# Altium PCB V2.PcbDoc
Units mil, origin at the board's own origin, x right, y up, seen from the top; angles counter-clockwise.
Board outline 2420 x 2113 mil, 2 copper layers (Top Layer, Bottom Layer); 77 components, 0 nets, 304 pads, 0 vias.
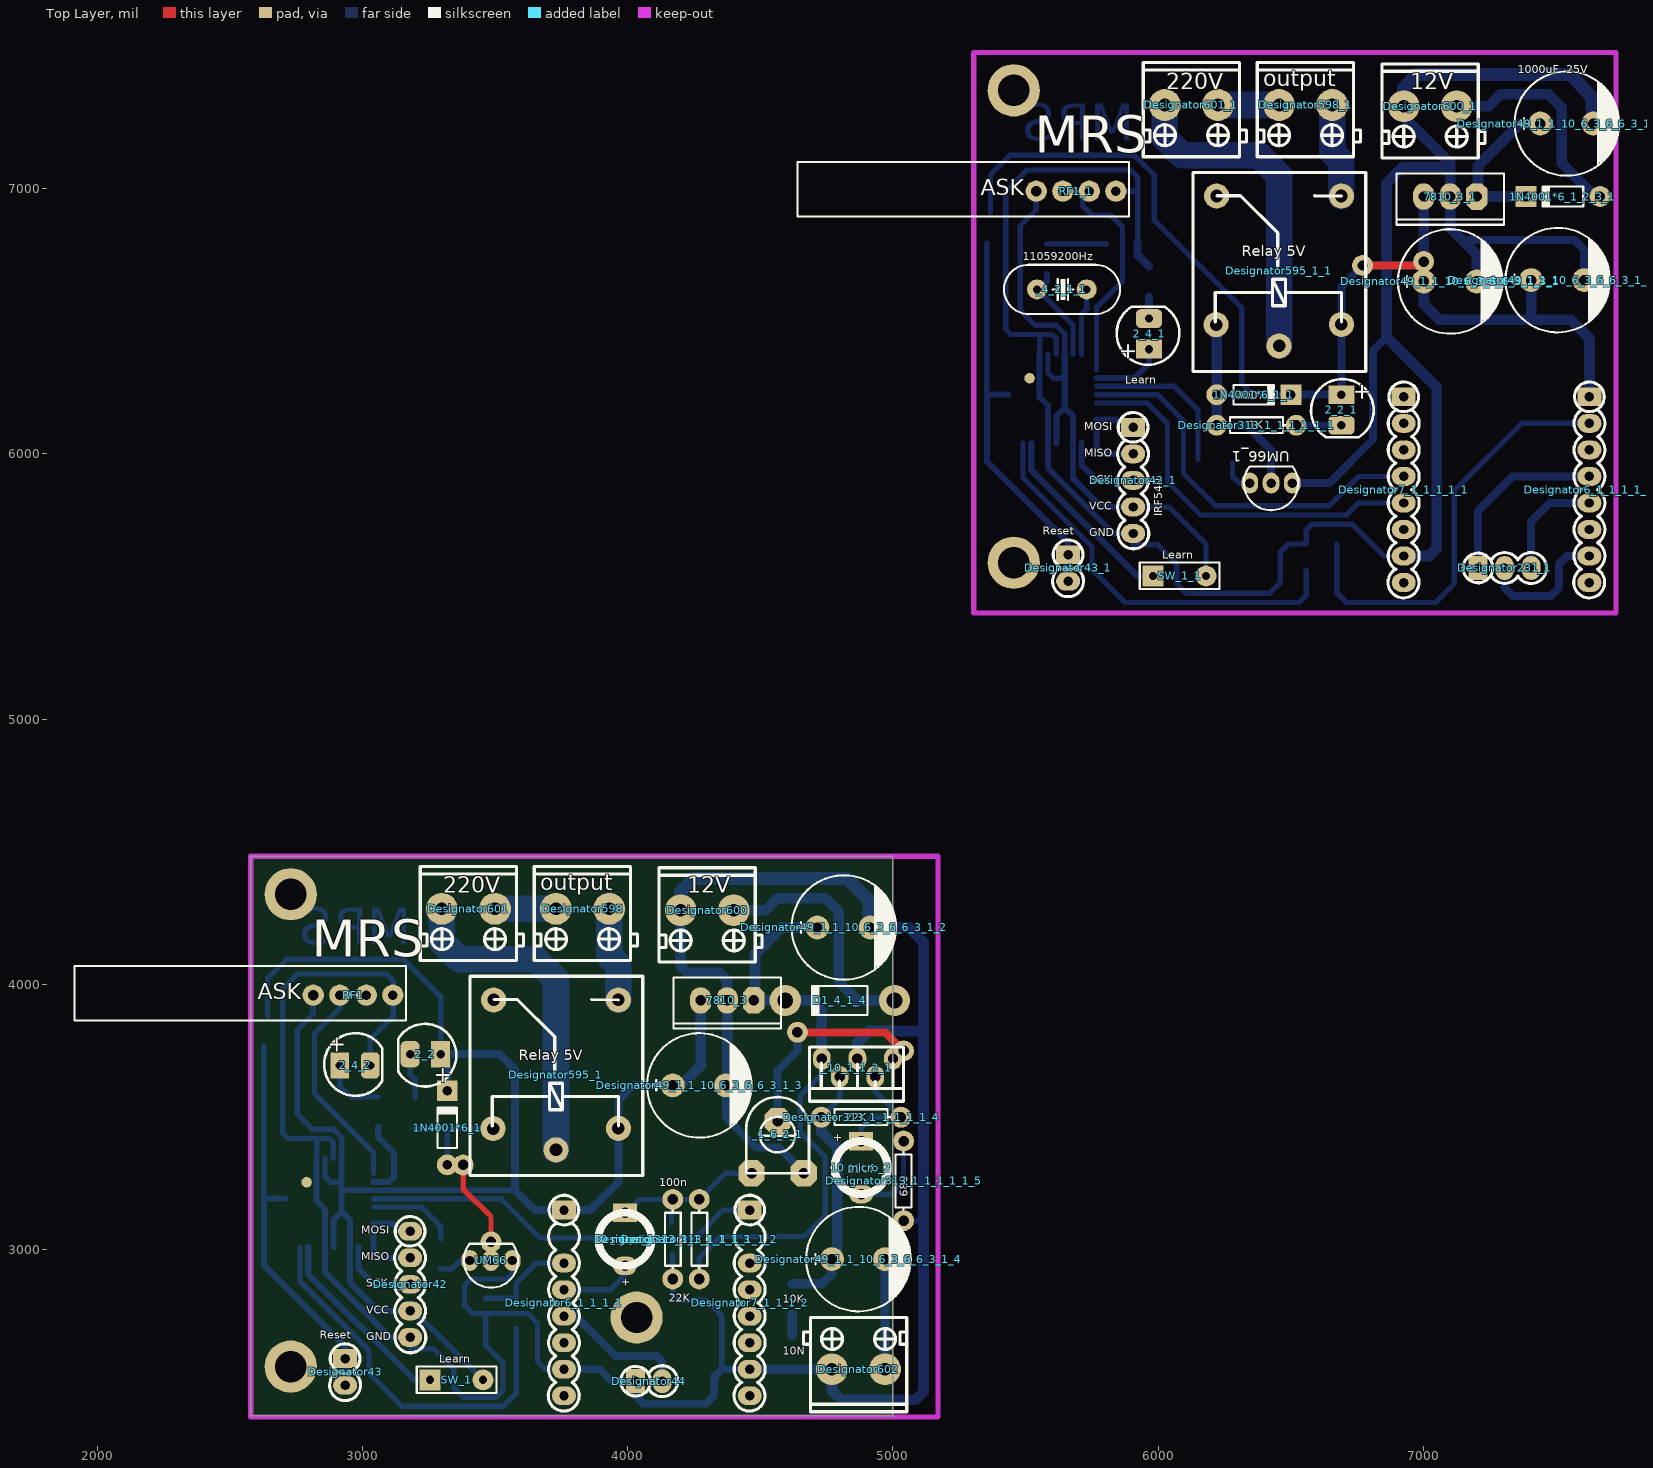
[diagram p0: Top Layer view]
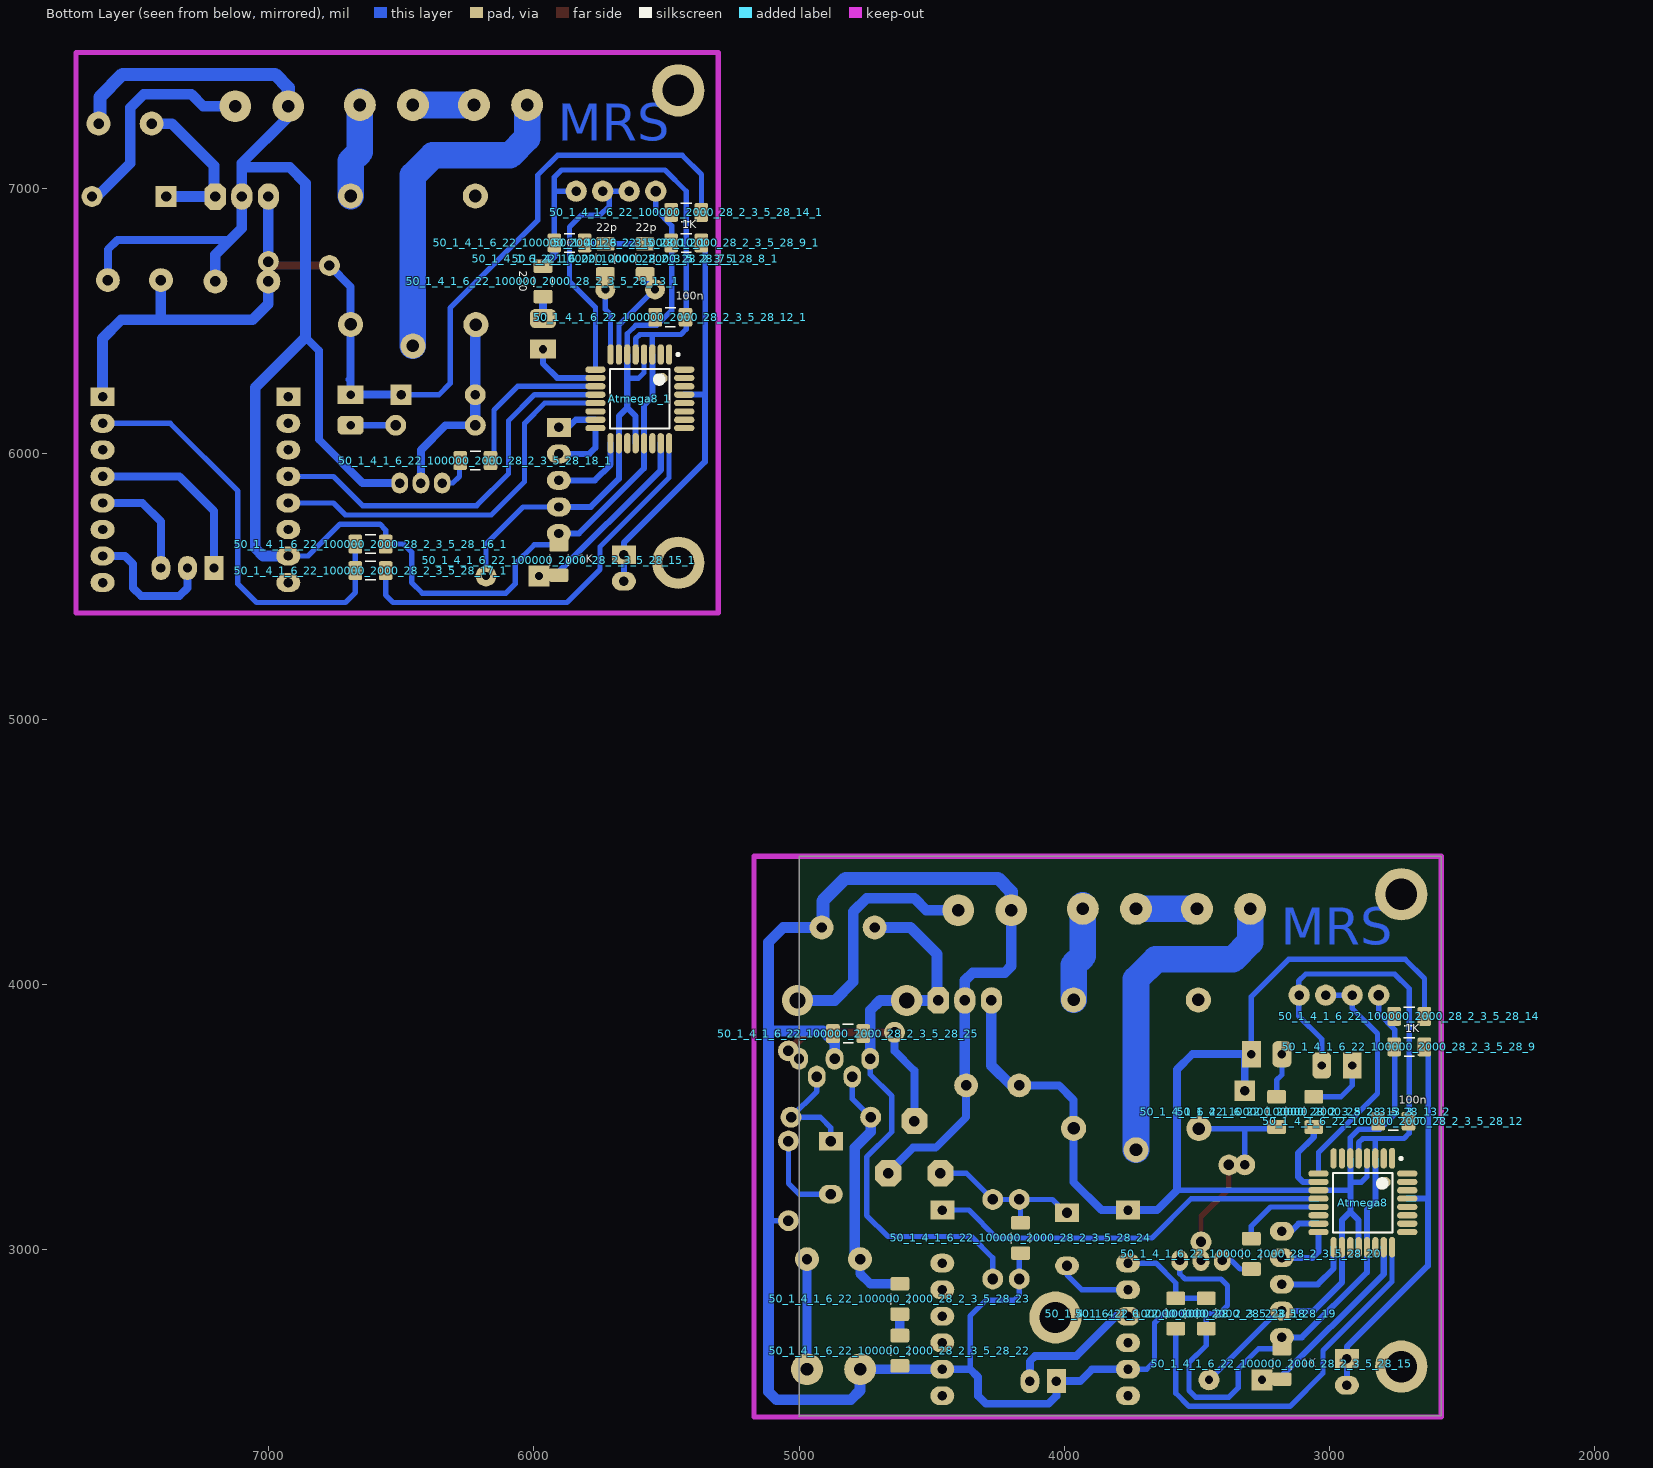
[diagram p1: Bottom Layer view, seen from below]

## Layer stack, top to bottom
Top Layer: signal copper 1.4
Dielectric: dielectric 12.6, FR-4, Dk 4.8
Bottom Layer: signal copper 1.4

## Board outline
2580,4483 5000,4483 5000,2370 4995,2375 2580,2375

## Design rules (kind name [scope] priority, off if disabled: settings)
Clearance [All] p1: gap=10
ComponentClearance [All] p1: gap=10 collisioncheckmode=3 verticalgap=10
PolygonConnect [All] p1: connectstyle=Relief reliefconductorwidth=10 reliefentries=4 polygonreliefangle="90 Angle"
RoutingVias [All] p1: holewidth=28 width=50 viastyle="Through Hole" minholewidth=28 minwidth=50 maxholewidth=28 maxwidth=50
SolderMaskExpansion [All] p1: expansion=4
TestPointUsage [All] p1: valid=0 allowmultiple=FALSE
Testpoint [All] p1: side=15 testpointundercomponent=TRUE minsize=40 maxsize=100 preferedsize=60 minholesize=0 maxholesize=40 preferedholesize=32 testpointgrid=1 style=1023 order=0-112345678
Width [All] p1: maxlimit=10 minlimit=10 preferedwidth=10
18 further rules are at their usual default settings.

## Components (designator, comment, footprint, x,y, rotation, side; value= is the part's Value field where it differs from the comment)
1N4001*6_1 "Comment" DIO7.1-3.9x1.9#1 3320,3460 r90 top
1N4001*6_1_1 "Comment" DIO7.1-3.9x1.9#1 6360,6223 r0 top
1N4001*6_1_2_3_1 "Comment" DIO7.1-3.9x1.9#2 7525,6970 r180 top
2_2 "Comment" LED-1 3240,3737.38 r270 top
2_2_1 "Comment" LED-1 6690,6168 r0 top
2_4_1 "Comment" LED-1 5965,6450 r180 top
2_4_2 "Comment" LED-1 2970,3695 r90 top
"10 micro_1" "" EC2/2 3990,3140 r180 top
"10 micro_2" "" EC2/2 4880,3410 r180 top
50_1_4_1_6_22_100000_2000_28_2_3_5_28_7_1 "Comment" RESC3216X70N 5730,6735 r270 bottom
50_1_4_1_6_22_100000_2000_28_2_3_5_28_8_1 "Comment" RESC3216X70N 5580,6735 r270 bottom
50_1_4_1_6_22_100000_2000_28_2_3_5_28_9 "Comment" RESC3216X70N 2700,3765 r0 bottom
50_1_4_1_6_22_100000_2000_28_2_3_5_28_9_1 "Comment" RESC3216X70N 5425,6795 r0 bottom
50_1_4_1_6_22_100000_2000_28_2_3_5_28_10_1 "Comment" RESC3216X70N 5865,6795 r0 bottom
50_1_4_1_6_22_100000_2000_28_2_3_5_28_12 "Comment" RESC3216X70N 2760,3485 r0 bottom
50_1_4_1_6_22_100000_2000_28_2_3_5_28_12_1 "Comment" RESC3216X70N 5485,6515 r0 bottom
50_1_4_1_6_22_100000_2000_28_2_3_5_28_13_1 "Comment" RESC3216X70N 5965,6650 r270 bottom
50_1_4_1_6_22_100000_2000_28_2_3_5_28_13_2 "Comment" RESC3216X70N 3060,3520 r90 bottom
50_1_4_1_6_22_100000_2000_28_2_3_5_28_13_3 "Comment" RESC3216X70N 3200,3520 r90 bottom
50_1_4_1_6_22_100000_2000_28_2_3_5_28_14 "Comment" RESC3216X70N 2700,3880 r0 bottom
50_1_4_1_6_22_100000_2000_28_2_3_5_28_14_1 "Comment" RESC3216X70N 5425,6910 r0 bottom
50_1_4_1_6_22_100000_2000_28_2_3_5_28_15 "Comment" RESC3216X70N 3180,2570 r90 bottom
50_1_4_1_6_22_100000_2000_28_2_3_5_28_15_1 "Comment" RESC3216X70N 5905,5600 r90 bottom
50_1_4_1_6_22_100000_2000_28_2_3_5_28_16_1 "Comment" RESC3216X70N 6615,5660 r180 bottom
50_1_4_1_6_22_100000_2000_28_2_3_5_28_17_1 "Comment" RESC3216X70N 6615,5560 r180 bottom
50_1_4_1_6_22_100000_2000_28_2_3_5_28_18 "Comment" RESC3216X70N 3580,2760 r90 bottom
50_1_4_1_6_22_100000_2000_28_2_3_5_28_18_1 "Comment" RESC3216X70N 6220,5975 r0 bottom
50_1_4_1_6_22_100000_2000_28_2_3_5_28_19 "Comment" RESC3216X70N 3465,2760 r90 bottom
50_1_4_1_6_22_100000_2000_28_2_3_5_28_20 "Comment" RESC3216X70N 3295,2985 r90 bottom
50_1_4_1_6_22_100000_2000_28_2_3_5_28_22 "Comment" RESC3216X70N 4620,2620 r270 bottom
50_1_4_1_6_22_100000_2000_28_2_3_5_28_23 "Comment" RESC3216X70N 4620,2815 r270 bottom
50_1_4_1_6_22_100000_2000_28_2_3_5_28_24 "Comment" RESC3216X70N 4165,3045 r270 bottom
50_1_4_1_6_22_100000_2000_28_2_3_5_28_25 "Comment" RESC3216X70N 4815,3815 r0 bottom
7810_3 "Comment" 221A-04 4375,3940 r180 top
7810_3_1 "Comment" 221A-04 7100,6970 r180 top
_1_6_2_1 "P-1" VR-P1 4585,3580 r270 top
_4_2_1_1 "Comment" XTAL 5730,6620 r180 top
_10_1_1_2_1 "Comment" "CASE 314B–05" 5000,3720 r180 top
Atmega8 "Comment" My_32A_M 2875,3177.38 r270 bottom
Atmega8_1 "Comment" My_32A_M 5600,6207.38 r270 bottom
D1_4_1_4 "1N4001" DIO10.46-5.3 4800,3940 r180 top
Designator6_1_1_1_1 "Comment" SIP8#1 3760,3150 r270 top
Designator6_1_1_1_1_1 "Comment" SIP8#2 7625,6215 r270 top
Designator7_1_1_1_1_1 "Comment" SIP8#3 6925,6215 r270 top
Designator7_1_1_1_2 "Comment" SIP8#4 4460,3150 r270 top
Designator42 "Comment" SIP5#1 3180,3070 r270 top
Designator42_1 "Comment" SIP5#2 5905,6100 r270 top
Designator43 "Comment" SIP2 2935,2590 r270 top
Designator43_1 "Comment" SIP2 5660,5620 r270 top
Designator44 "Comment" SIP2 4030,2505 r0 top
Designator49_1_1_10_6_3_6_6_3_1_2 "Comment" "cap 04" 4815,4215 r180 top
Designator49_1_1_10_6_3_6_6_3_1_2_1 "Comment" "cap 04" 7540,7245 r180 top
Designator49_1_1_10_6_3_6_6_3_1_3 "Comment" "cap 04" 4270,3620 r180 top
Designator49_1_1_10_6_3_6_6_3_1_3_1 "Comment" "cap 04" 7100,6650 r180 top
Designator49_1_1_10_6_3_6_6_3_1_4 "Comment" "cap 04" 4870,2965 r180 top
Designator49_1_1_10_6_3_6_6_3_1_5_1 "Comment" "cap 04" 7505,6655 r180 top
Designator231_1 "Comment" SIP3 7205,5570 r0 top
Designator313_1_1_1_1_1_1 "Comment" AXIAL-0.3 6370,6108 r0 top
Designator313_1_1_1_1_1_2 "Comment" AXIAL-0.3 4270,3040 r90 top
Designator313_1_1_1_1_1_3 "Comment" AXIAL-0.3 4170,3040 r90 top
Designator313_1_1_1_1_1_4 "Comment" AXIAL-0.3 4880,3500 r180 top
Designator313_1_1_1_1_1_5 "Comment" AXIAL-0.3 5040,3260 r270 top
Designator595_1 "Comment" RELAY3 3965,3458 r180 top
Designator595_1_1 "Comment" RELAY3 6690,6488 r180 top
Designator598 "Comment" TER2 3930,4285 r0 top
Designator598_1 "Comment" TER2 6655,7315 r0 top
Designator600 "Comment" TER2 4400,4280 r0 top
Designator600_1 "Comment" TER2 7125,7310 r0 top
Designator601 "Comment" TER2 3500,4285 r0 top
Designator601_1 "Comment" TER2 6225,7315 r0 top
Designator602 "Comment" TER2 4770,2550 r180 top
RF1 "Comment" HDR1X4 2815,3960 r0 top
RF1_1 "Comment" HDR1X4 5540,6990 r0 top
SW_1 "Comment" HDR1X3 3255,2510 r0 top
SW_1_1 "Comment" HDR1X3 5980,5540 r0 top
UM66 "Comment" 78LXX#1 3485,2960 r0 top
UM66_1 "Comment" 78LXX#2 6425,5890 r0 top

## Footprints (in the part's own frame and the unit in brackets; to place one, negate y for a bottom-side part, rotate by r counter-clockwise, add the part's x,y. Pads: shape width x height; smd on the part's side, far side on the other; paste and mask are expansions set on the pad)
78LXX#1 [mm]
  oval 1.6x2 hole 0.9: B(-2.032,0) C(0,0)
  oval 1.6x2 hole 0.9 mask+0.102: E(2.032,0)
  silkscreen extent -2.6,-2.6 2.6,1.6, body extent -2.48,-2.3 2.32,1.63, height 8
78LXX#2 [mm]
  oval 1.6x2 hole 0.9: GND(2.032,0) Out(-2.032,0) VCC(0,0)
  silkscreen extent -2.6,-2.6 2.6,1.6, body extent -2.48,-2.3 2.32,1.63, height 8
221A-04 [mil]
  oval 80x100 hole 39.37: D(0,0) S(100,0)
  oct 80x100 hole 39.37: G(-100,0)
  silkscreen extent -203,-87 203,106
AXIAL-0.3 [mm]
  round 2 hole 1.016: 1(-3.81,0) 2(3.81,0)
  silkscreen extent -2.77,-0.76 2.77,0.76
"cap 04" [mil]
  round 90 hole 39.37: 1(100,0) 2(-100,0)
  silkscreen extent -197,-197 197,197, body extent -198,-197 198,199, height 513
"CASE 314B–05" [mm]
  oval 1.7x2.1 hole 1: 1(0,0) 2(1.702,1.702) 3(3.404,0) 4(5.105,1.702) 5(6.807,0)
  silkscreen extent -0.99,-1.14 7.98,4.06
DIO7.1-3.9x1.9#1 [mm]
  round 2 hole 0.9: 1(-3.55,0)
  rect 2x2 hole 0.9: 2(3.55,0)
  silkscreen extent -1.95,-0.95 2.05,0.95
DIO7.1-3.9x1.9#2 [mm]
  round 2 hole 1: 1(-3.55,0)
  rect 2x2 hole 1: 2(3.55,0)
  silkscreen extent -1.95,-0.95 2.05,0.95
DIO10.46-5.3 [mm]
  round 3 hole 1.5: 1(-5.23,0) 2(5.23,0)
  silkscreen extent -2.65,-1.4 2.75,1.4
EC2/2 [mil]
  rect 90x70 hole 39.37: 1(0,0)
  oval 90x70 hole 39.37: 2(0,200)
  silkscreen extent -100,0 100,200
HDR1X3 [mm]
  round 0 all layers, no hole: 2(2.54,0)
  round 2 hole 0.8: +(5.08,0)
  rect 2x2 hole 0.8: -(0,0)
  silkscreen extent -1.27,-1.27 6.35,1.27
HDR1X4 [mil] "Connector; Header; 4 Position"
  round 80 hole 35.43: 2(100,0) -(300,0) ""(200,0)
  round 80 hole 40: +(0,0)
  silkscreen extent -900,-95 350,110
LED-1 [mm] "LED; 2 Leads"
  rect 2.5x1.8 hole 0.8: 1(0,1.397)
  rrect50% 2.5x1.8 hole 0.8: 2(0,-1.524)
  silkscreen extent -2.91,-2.67 3.09,2.9
My_32A_M [mm]
  oct 1.95x0.6 smd: 1(-4.25,2.8)
  oval 0.6x1.95 smd: 10(-2,-4.25) 13(0.4,-4.25) 14(1.2,-4.25) 25(2.8,4.25) 26(2,4.25) 27(1.2,4.25) 32(-2.8,4.25) B0(-0.4,-4.25) C5(0.4,4.25) D5(-2.8,-4.25) D7(-1.2,-4.25) MISO(2.8,-4.25) MOSI(2,-4.25) RESET(-0.4,4.25) RX(-1.2,4.25) TX(-2,4.25)
  oval 1.95x0.6 smd: 19(4.25,-1.2) 22(4.25,1.2) 24(4.25,2.8) AREF(4.25,-0.4) AVCC(4.25,-2) B5/SCK(4.25,-2.8) C0(4.25,2) D4(-4.25,2) GND(-4.25,-0.4) GND(-4.25,1.2) GND(4.25,0.4) VCC(-4.25,-1.2) VCC(-4.25,0.4) XTAL(-4.25,-2.8) XTAL(-4.25,-2)
  silkscreen extent -4.37,-2.85 2.85,3.77, body extent -3.5,-3.5 3.5,3.5, height 1.2
RELAY3 [mm]
  round 2.4 hole 1.2: 1(0,0) 2(11.989,0.025) 3(5.969,2.057) 4(11.938,-12.294) 5(0,-12.294)
  silkscreen extent -2.34,-14.55 14.2,4.52
RESC3216X70N [mm] "Chip Resistor, Body 3.2x1.6mm, EIA 1206, IPC Medium Density"
  round 0.508 on Mech15: 0(0,0)
  rrect25% 1.3x1.8 smd: 1(-1.45,0) 2(1.45,0)
  silkscreen extent -0.51,-0.89 0.51,0.89, body extent -1.62,-0.82 1.63,0.83, height 0.69
SIP2 [mm]
  rect 1.8x2.3 hole 0.9: 1(0,0)
  oval 1.8x2.3 hole 0.9: 2(2.54,0)
  silkscreen extent -1.42,-1.48 4.02,1.48
SIP3 [mm]
  rect 1.8x2.3 hole 0.9: 1(0,0)
  oval 1.8x2.3 hole 0.9: 2(2.54,0) 3(5.08,0)
  silkscreen extent -1.42,-1.48 6.56,1.48
SIP5#1 [mm]
  oval 1.8x2.3 hole 0.9: 1(0,0) 2(2.54,0) 3(5.08,0) 4(7.62,0) 5(10.16,0)
  silkscreen extent -1.42,-1.48 11.62,1.5
SIP5#2 [mm]
  rect 1.8x2.3 hole 0.9: 1(0,0)
  oval 1.8x2.3 hole 0.9: 2(2.54,0) 3(5.08,0) 4(7.62,0) 5(10.16,0)
  silkscreen extent -1.42,-1.48 11.62,1.5
SIP8#1 [mm]
  oval 1.8x2.3 hole 0.9: DAC_L(10.16,0) DAC_R(7.62,0) GNF(15.24,0) SPK+(12.7,0) SPK-(17.78,0) TX(5.08,0)
  round 0 all layers, no hole: RX(2.54,0)
  rect 1.8x2.3 hole 0.9: vcc(0,0)
  silkscreen extent -1.42,-1.5 19.24,1.48
SIP8#2 [mm]
  oval 1.8x2.3 hole 0.9: DAC_L(10.16,0) DAC_R(7.62,0) GNF(15.24,0) RX(2.54,0) SPK+(12.7,0) SPK-(17.78,0) TX(5.08,0)
  rect 1.8x2.3 hole 0.9: vcc(0,0)
  silkscreen extent -1.42,-1.5 19.24,1.48
SIP8#3 [mm]
  oval 1.8x2.3 hole 0.9: ADDKEY(7.62,0) ADDKEY(10.16,0) GND(15.24,0) IO1(17.78,0) IO2(12.7,0) USB+(5.08,0) USB-(2.54,0)
  rect 1.8x2.3 hole 0.9: BUSY(0,0)
  silkscreen extent -1.42,-1.5 19.24,1.48
SIP8#4 [mm]
  oval 1.8x2.3 hole 0.9: ADDKEY(7.62,0) ADDKEY(10.16,0) GND(15.24,0) IO1(17.78,0) IO2(12.7,0) USB+(5.08,0)
  rect 1.8x2.3 hole 0.9: BUSY(0,0)
  round 0 all layers, no hole: USB-(2.54,0)
  silkscreen extent -1.42,-1.5 19.24,1.48
TER2 [mil]
  round 120 hole 47.24: 1(0,0) 2(-200,0)
  silkscreen extent -282,-195 107,160
VR-P1 [mm]
  oct 2.5x2.5 hole 1: 263(7.4,2) 264(7.4,-3) 266(2.4,-0.5)
  oct 0x0 all layers, no hole: 265(4.9,-0.5) 267(-0.1,-0.5)
  silkscreen extent 0.1,-3.5 7.4,2.5
XTAL [mil]
  round 75 hole 30: 1(0,0) 2(187.4,0)
  silkscreen extent -126,-93 311,93, body extent -131,-94 316,95, height 514

## Part data
7810_3 7810_3_1: library part MC7805BT
RF1 RF1_1: library part COAX-M
SW_1 SW_1_1: library part "Header 3"

## Free pads (board coordinates)
  round 196.85 hole 118.11: 0(2730,2560) 0(2730,4340) 0(4033.74,2745) 0(5455,5590) 0(5455,7370)
  round 40 all layers, no hole: 0(2790,3255) 0(5515,6285)
  round 78.74 hole 39.37: 0(3380,3320) 0(7000,6725) 1(3485,3030) 1(6770,6710) 2(5040,3750) 3(4640,3820)

## Nets (pads, with @x,y where several pads share a name; then routed paths per layer and width w, separated by ;. In a path a pad name is that pad's centre, name@x,y a point inside that pad or via, vN(x,y) a via of type N, cw(c..) or ccw(c..) an arc to the next point about the centre after c; other vN are vias at no path point)
pads on no net: 1N4001*6_1.1 1N4001*6_1.2 1N4001*6_1_1.1 1N4001*6_1_1.2 1N4001*6_1_2_3_1.1 1N4001*6_1_2_3_1.2 2_2.1 2_2.2 2_2_1.1 2_2_1.2 2_4_1.1 2_4_1.2 2_4_2.1 2_4_2.2 50_1_4_1_6_22_100000_2000_28_2_3_5_28_7_1.0 50_1_4_1_6_22_100000_2000_28_2_3_5_28_7_1.1 50_1_4_1_6_22_100000_2000_28_2_3_5_28_7_1.2 50_1_4_1_6_22_100000_2000_28_2_3_5_28_8_1.0 50_1_4_1_6_22_100000_2000_28_2_3_5_28_8_1.1 50_1_4_1_6_22_100000_2000_28_2_3_5_28_8_1.2 50_1_4_1_6_22_100000_2000_28_2_3_5_28_9.0 50_1_4_1_6_22_100000_2000_28_2_3_5_28_9.1 50_1_4_1_6_22_100000_2000_28_2_3_5_28_9.2 50_1_4_1_6_22_100000_2000_28_2_3_5_28_9_1.0 50_1_4_1_6_22_100000_2000_28_2_3_5_28_9_1.1 50_1_4_1_6_22_100000_2000_28_2_3_5_28_9_1.2 50_1_4_1_6_22_100000_2000_28_2_3_5_28_10_1.0 50_1_4_1_6_22_100000_2000_28_2_3_5_28_10_1.1 50_1_4_1_6_22_100000_2000_28_2_3_5_28_10_1.2 50_1_4_1_6_22_100000_2000_28_2_3_5_28_12.0 50_1_4_1_6_22_100000_2000_28_2_3_5_28_12.1 50_1_4_1_6_22_100000_2000_28_2_3_5_28_12.2 50_1_4_1_6_22_100000_2000_28_2_3_5_28_12_1.0 50_1_4_1_6_22_100000_2000_28_2_3_5_28_12_1.1 50_1_4_1_6_22_100000_2000_28_2_3_5_28_12_1.2 50_1_4_1_6_22_100000_2000_28_2_3_5_28_13_1.0 50_1_4_1_6_22_100000_2000_28_2_3_5_28_13_1.1 50_1_4_1_6_22_100000_2000_28_2_3_5_28_13_1.2 50_1_4_1_6_22_100000_2000_28_2_3_5_28_13_2.0 50_1_4_1_6_22_100000_2000_28_2_3_5_28_13_2.1 50_1_4_1_6_22_100000_2000_28_2_3_5_28_13_2.2 50_1_4_1_6_22_100000_2000_28_2_3_5_28_13_3.0 50_1_4_1_6_22_100000_2000_28_2_3_5_28_13_3.1 50_1_4_1_6_22_100000_2000_28_2_3_5_28_13_3.2 50_1_4_1_6_22_100000_2000_28_2_3_5_28_14.0 50_1_4_1_6_22_100000_2000_28_2_3_5_28_14.1 50_1_4_1_6_22_100000_2000_28_2_3_5_28_14.2 50_1_4_1_6_22_100000_2000_28_2_3_5_28_14_1.0 50_1_4_1_6_22_100000_2000_28_2_3_5_28_14_1.1 50_1_4_1_6_22_100000_2000_28_2_3_5_28_14_1.2 50_1_4_1_6_22_100000_2000_28_2_3_5_28_15.0 50_1_4_1_6_22_100000_2000_28_2_3_5_28_15.1 50_1_4_1_6_22_100000_2000_28_2_3_5_28_15.2 50_1_4_1_6_22_100000_2000_28_2_3_5_28_15_1.0 50_1_4_1_6_22_100000_2000_28_2_3_5_28_15_1.1 50_1_4_1_6_22_100000_2000_28_2_3_5_28_15_1.2 50_1_4_1_6_22_100000_2000_28_2_3_5_28_16_1.0 50_1_4_1_6_22_100000_2000_28_2_3_5_28_16_1.1 50_1_4_1_6_22_100000_2000_28_2_3_5_28_16_1.2 50_1_4_1_6_22_100000_2000_28_2_3_5_28_17_1.0 50_1_4_1_6_22_100000_2000_28_2_3_5_28_17_1.1 50_1_4_1_6_22_100000_2000_28_2_3_5_28_17_1.2 50_1_4_1_6_22_100000_2000_28_2_3_5_28_18.0 50_1_4_1_6_22_100000_2000_28_2_3_5_28_18.1 50_1_4_1_6_22_100000_2000_28_2_3_5_28_18.2 50_1_4_1_6_22_100000_2000_28_2_3_5_28_18_1.0 50_1_4_1_6_22_100000_2000_28_2_3_5_28_18_1.1 50_1_4_1_6_22_100000_2000_28_2_3_5_28_18_1.2 50_1_4_1_6_22_100000_2000_28_2_3_5_28_19.0 50_1_4_1_6_22_100000_2000_28_2_3_5_28_19.1 50_1_4_1_6_22_100000_2000_28_2_3_5_28_19.2 50_1_4_1_6_22_100000_2000_28_2_3_5_28_20.0 50_1_4_1_6_22_100000_2000_28_2_3_5_28_20.1 50_1_4_1_6_22_100000_2000_28_2_3_5_28_20.2 50_1_4_1_6_22_100000_2000_28_2_3_5_28_22.0 50_1_4_1_6_22_100000_2000_28_2_3_5_28_22.1 50_1_4_1_6_22_100000_2000_28_2_3_5_28_22.2 50_1_4_1_6_22_100000_2000_28_2_3_5_28_23.0 50_1_4_1_6_22_100000_2000_28_2_3_5_28_23.1 50_1_4_1_6_22_100000_2000_28_2_3_5_28_23.2 50_1_4_1_6_22_100000_2000_28_2_3_5_28_24.0 50_1_4_1_6_22_100000_2000_28_2_3_5_28_24.1 50_1_4_1_6_22_100000_2000_28_2_3_5_28_24.2 50_1_4_1_6_22_100000_2000_28_2_3_5_28_25.0 50_1_4_1_6_22_100000_2000_28_2_3_5_28_25.1 50_1_4_1_6_22_100000_2000_28_2_3_5_28_25.2 7810_3.D 7810_3.G 7810_3.S 7810_3_1.D 7810_3_1.G 7810_3_1.S "10 micro_1.1" "10 micro_1.2" "10 micro_2.1" "10 micro_2.2" _1_6_2_1.263 _1_6_2_1.264 _1_6_2_1.265 _1_6_2_1.266 _1_6_2_1.267 _4_2_1_1.1 _4_2_1_1.2 _10_1_1_2_1.1 _10_1_1_2_1.2 _10_1_1_2_1.3 _10_1_1_2_1.4 _10_1_1_2_1.5 Atmega8.1 Atmega8.10 Atmega8.13 Atmega8.14 Atmega8.19 Atmega8.22 Atmega8.24 Atmega8.25 Atmega8.26 Atmega8.27 Atmega8.32 Atmega8.AREF Atmega8.AVCC Atmega8.B0 Atmega8.B5/SCK Atmega8.C0 Atmega8.C5 Atmega8.D4 Atmega8.D5 Atmega8.D7 Atmega8.GND Atmega8.MISO Atmega8.MOSI Atmega8.RESET Atmega8.RX Atmega8.TX Atmega8.VCC Atmega8.XTAL Atmega8_1.1 Atmega8_1.10 Atmega8_1.13 Atmega8_1.14 Atmega8_1.19 Atmega8_1.22 Atmega8_1.24 Atmega8_1.25 Atmega8_1.26 Atmega8_1.27 Atmega8_1.32 Atmega8_1.AREF Atmega8_1.AVCC Atmega8_1.B0 Atmega8_1.B5/SCK Atmega8_1.C0 Atmega8_1.C5 Atmega8_1.D4 Atmega8_1.D5 Atmega8_1.D7 Atmega8_1.GND Atmega8_1.MISO Atmega8_1.MOSI Atmega8_1.RESET Atmega8_1.RX Atmega8_1.TX Atmega8_1.VCC Atmega8_1.XTAL D1_4_1_4.1 D1_4_1_4.2 Designator6_1_1_1_1.DAC_L Designator6_1_1_1_1.DAC_R Designator6_1_1_1_1.GNF Designator6_1_1_1_1.RX Designator6_1_1_1_1.SPK+ Designator6_1_1_1_1.SPK- Designator6_1_1_1_1.TX Designator6_1_1_1_1.vcc Designator6_1_1_1_1_1.DAC_L Designator6_1_1_1_1_1.DAC_R Designator6_1_1_1_1_1.GNF Designator6_1_1_1_1_1.RX Designator6_1_1_1_1_1.SPK+ Designator6_1_1_1_1_1.SPK- Designator6_1_1_1_1_1.TX Designator6_1_1_1_1_1.vcc Designator7_1_1_1_1_1.ADDKEY Designator7_1_1_1_1_1.BUSY Designator7_1_1_1_1_1.GND Designator7_1_1_1_1_1.IO1 Designator7_1_1_1_1_1.IO2 Designator7_1_1_1_1_1.USB+ Designator7_1_1_1_1_1.USB- Designator7_1_1_1_2.ADDKEY Designator7_1_1_1_2.BUSY Designator7_1_1_1_2.GND Designator7_1_1_1_2.IO1 Designator7_1_1_1_2.IO2 Designator7_1_1_1_2.USB+ Designator7_1_1_1_2.USB- Designator42.1 Designator42.2 Designator42.3 Designator42.4 Designator42.5 Designator42_1.1 Designator42_1.2 Designator42_1.3 Designator42_1.4 Designator42_1.5 Designator43.1 Designator43.2 Designator43_1.1 Designator43_1.2 Designator44.1 Designator44.2 Designator49_1_1_10_6_3_6_6_3_1_2.1 Designator49_1_1_10_6_3_6_6_3_1_2.2 Designator49_1_1_10_6_3_6_6_3_1_2_1.1 Designator49_1_1_10_6_3_6_6_3_1_2_1.2 Designator49_1_1_10_6_3_6_6_3_1_3.1 Designator49_1_1_10_6_3_6_6_3_1_3.2 Designator49_1_1_10_6_3_6_6_3_1_3_1.1 Designator49_1_1_10_6_3_6_6_3_1_3_1.2 Designator49_1_1_10_6_3_6_6_3_1_4.1 Designator49_1_1_10_6_3_6_6_3_1_4.2 Designator49_1_1_10_6_3_6_6_3_1_5_1.1 Designator49_1_1_10_6_3_6_6_3_1_5_1.2 Designator231_1.1 Designator231_1.2 Designator231_1.3 Designator313_1_1_1_1_1_1.1 Designator313_1_1_1_1_1_1.2 Designator313_1_1_1_1_1_2.1 Designator313_1_1_1_1_1_2.2 Designator313_1_1_1_1_1_3.1 Designator313_1_1_1_1_1_3.2 Designator313_1_1_1_1_1_4.1 Designator313_1_1_1_1_1_4.2 Designator313_1_1_1_1_1_5.1 Designator313_1_1_1_1_1_5.2 Designator595_1.1 Designator595_1.2 Designator595_1.3 Designator595_1.4 Designator595_1.5 Designator595_1_1.1 Designator595_1_1.2 Designator595_1_1.3 Designator595_1_1.4 Designator595_1_1.5 Designator598.1 Designator598.2 Designator598_1.1 Designator598_1.2 Designator600.1 Designator600.2 Designator600_1.1 Designator600_1.2 Designator601.1 Designator601.2 Designator601_1.1 Designator601_1.2 Designator602.1 Designator602.2 RF1. RF1.2 RF1.+ RF1.- RF1_1. RF1_1.2 RF1_1.+ RF1_1.- SW_1.2 SW_1.+ SW_1.- SW_1_1.2 SW_1_1.+ SW_1_1.- UM66.B UM66.C UM66.E UM66_1.GND UM66_1.Out UM66_1.VCC
copper on no net: | length 69447.1
  Top Layer w20: 3380,3320 3380,3230 3485,3125 3485,3030
  Top Layer w30: 4640,3820 4970,3820 5040,3750 ; 6770,6710 6985,6710
  Bottom Layer w20: 2627.91,3175 2627.91,3765 ; 2642.91,3880 2642.91,4022.91 2715,4095 3155,4095 3295,3955 3295,3737.38 ; 2764.76,3010.05 2764.76,2880.24 3025,2620 3025,2535 3150,2410 3530,2410 3580,2460 3580,2702.91 ; 2815,3960 2815,3890 2755,3830 2755,3510 2810,3455 2890,3455 2922.24,3422.76 2922.24,3344.7 ; 2827.76,3344.7 2827.76,3420 ; 2859.25,3344.7 2859.25,3275.75 2880,3255 2922.24,3255 ; 2890.75,3344.7 2890.75,3404.25 2875,3420 2828.05,3420 2720,3420 2700,3440 2700,3985 2755,4040 3090,4040 3117.09,4012.91 3117.09,3882.09 3030,3795 3030,3695 ; 2915,3695 2915,3620 2957.91,3577.09 3060,3577.09 ; 2915,3960 2915,3910 2820,3815 2820,3590 3042.32,3367.68 3042.32,3287.61 ; 2922.24,3225 2922.62,3224.62 3575,3224.62 ; 2940,3960 3035,3960 ; 3042.32,3161.63 3223.37,3161.63 3295,3090 3295,3042.09 ; 3042.32,3193.12 3211.88,3193.12 3521.88,3193.12 3670,3045 3932.91,3045 ; 3180,2627.09 3267.91,2627.09 3345,2550 3345,2480 3380,2445 3505,2445 3530,2470 3530,2575 3465,2640 3465,2702.91 3465,2755 ; 3180,2770 3195,2770 3455,2510 ; 3180,3767.38 3180,3660 3200,3640 3200,3577.09 ; 3198,3457 3320,3457 ; 3295,2927.91 3337.91,2927.91 3370,2960 3405,2960 ; 3320,3320.24 3320,3457 ; 3465,2817.09 3580,2817.09 3580,2875 3655,2950 3760,2950 ; 3493,3457 3320,3457 ; 3565,2960 3565,2910 3545,2890 3410,2890 3385,2865 3385,2790 3415,2760 3625,2760 3660,2725 3660,2580 3690,2550 3760,2550 ; 3760,2850 3935,2850 3990,2905 3990,2940 ; 3930,3045 4255,3045 4360,3150 4460,3150 ; 3990,3135 4045,3190 4270,3190 4368.66,3288.66 4466.89,3288.66 ; 4165,3102.09 4165,3185 ; 4170,2982.91 4170,2890 4170,2830 4190,2810 4295,2810 4355,2750 4355,2560 ; 4270,2890 4270,2970 4350,3050 4665,3050 4745,3130 4745,3350 4650,3445 4650,3580 4732,3662 4732,3720 ; 4730,3500 4799,3569 4799,3653 ; 4880,3210 5000,3210 5040,3250 5040,3410 ; 4880,3410 4880,3460 4920,3500 5030,3500 4933,3597 4933,3653 ; 5040,3110 5110,3110 ; 5352.91,6205 5352.91,6795 ; 5367.91,6910 5367.91,7052.91 5440,7125 5910,7125 5985,7050 5985,6880 6315,6550 6315,6265 6357,6223 6499.76,6223 ; 5489.76,6040.05 5489.76,5910.24 5750,5650 5750,5565 5875,5440 6530,5440 6557.91,5467.91 6557.91,5560 ; 5540,6990 5540,6920 5480,6860 5480,6540 5535,6485 5615,6485 5647.24,6452.76 5647.24,6374.7 ; 5542.6,6620 5545,6620 5645,6520 5678.74,6486.26 5678.74,6374.7 ; 5552.76,6374.7 5552.76,6450 ; 5580,6792.09 5730,6792.09 5805,6792.09 ; 5584.25,6374.7 5584.25,6305.75 5605,6285 5647.24,6285 ; 5615.75,6374.7 5615.75,6434.25 5600,6450 5553.05,6450 5445,6450 5425,6470 5425,6990 5505,7070 5895,7070 5922.09,7042.91 5922.09,6795 ; 5665,6990 5760,6990 ; 5710.24,6374.7 5710.24,6525.24 5730,6545 5730,6620 ; 5715,6990 5715,6935 5750,6900 5820,6900 5865,6855 5865,6650 5767.32,6552.32 5767.32,6317.61 ; 5767.32,6191.63 5958.37,6191.63 6035,6115 6035,5895 6160,5770 6710,5770 6755,5815 6925,5815 ; 5767.32,6223.12 5996.88,6223.12 6095,6125 6095,5925 6215,5805 6645,5805 6755,5915 6925,5915 ; 5767.32,6254.62 6060.38,6254.62 6150,6165 6150,5980 ; 5865,6990 5922.09,6990 ; 5905,5657.09 5997.91,5657.09 6070,5585 6070,5510 6105,5475 6420,5475 6460,5515 6460,5630 6490,5660 6557.91,5660 6557.91,5712.91 6580,5735 6730,5735 6850,5615 6935,5615 ; 5905,5800 6040,5800 6180,5660 6180,5540 ; 6280,5965 6280,5915 6305,5890 6345,5890 ; 6672.09,5660 6672.09,5560 6672.09,5477.91 6710,5440 7045,5440 7115,5510 7115,5860 7370,6115 7625,6115
  Bottom Layer w23: 2707.68,3193.12 2630,3193.12 2630,3175 2630,2940 2935,2635 2935,2490 ; 2796.26,3010.05 2796.26,2908.74 3195,2510 3265,2510 ; 2827.76,3344.7 2827.76,3183.83 2859.25,3152.33 2859.25,3010.05 2859.25,2915.75 3105,2670 3180,2670 ; 2890.75,3010.05 2890.75,3111.96 2922.24,3143.45 ; 2922.24,3344.7 2922.24,3143.45 ; 2985.24,3010.05 2985.24,2929.76 3045,2870 3180,2870 ; 3042.32,3067.14 3042.32,2992.68 3065,2970 3180,2970 ; 3042.32,3098.64 3116.36,3098.64 3145,3070 3180,3070 ; 3042.32,3256.12 3101.12,3256.12 3120,3275 3120,3365 3060,3425 3060,3462.91 ; 3180,2770 3060,2770 2953.74,2876.26 2953.74,3010.05 2953.74,3111.96 2922.24,3143.45 ; 5432.68,6223.12 5355,6223.12 5355,6205 5355,5970 5660,5665 5660,5520 ; 5521.26,6040.05 5521.26,5938.74 5920,5540 5990,5540 ; 5550,6620 5580,6650 5580,6677.91 ; 5552.76,6374.7 5552.76,6213.83 5584.25,6182.33 5584.25,6040.05 5584.25,5945.75 5830,5700 5905,5700 ; 5615.75,6040.05 5615.75,6141.96 5647.24,6173.45 ; 5647.24,6374.7 5647.24,6173.45 ; 5710.24,6040.05 5710.24,5959.76 5770,5900 5905,5900 ; 5767.32,6097.14 5767.32,6022.68 5790,6000 5905,6000 ; 5767.32,6128.64 5841.36,6128.64 5870,6100 5905,6100 ; 5767.32,6286.12 5911.12,6286.12 5965,6340 5965,6395 ; 5905,5800 5785,5800 5678.74,5906.26 5678.74,6040.05 5678.74,6141.96 5647.24,6173.45 ; 6515,6108 6690,6108
  Bottom Layer w30: 3295,3737.38 3517.62,3737.38 3575,3680 3575,3225 3650,3150 3770,3150 ; 3320,3599.76 3320,3732.38 ; 3735,3150 3785,3150 ; 3750,3150 3860,3150 3965,3255 3965,3458 3965,3565 4020,3620 4200,3620 ; 3760,2550 3895,2550 3940,2505 4030,2505 4030,2450 4060,2420 4295,2420 4325,2450 4325,2520 ; 3760,2750 3805,2750 3955,2600 4110,2600 4130,2580 4130,2505 ; 4327.5,2522.5 4355,2550 4460,2550 ; 4370,3620 4370,3500 4485,3385 4570,3385 4675,3280 ; 4475,3940 4600.24,3940 ; 4565.31,3485.51 4565.31,3675.31 4640,3750 4640,3820 ; 5922.09,6795 5922.09,6750 5965,6707.09 ; 5965,6510 5965,6592.91 ; 6220,6108 6332,6108 6425,6015 6425,5890 ; 6499.76,6223 6690,6223 6690,6488 ; 6505,5890 6645,5890 6810,6055 6810,6390 6860,6440 ; 6695,6280 6690,6285 6690,6488 ; 6770,6710 6690,6630 6690,6488 ; 7143.99,6806.01 7568.99,6806.01 7605,6770 7605,6655 ; 7205,5570 7205,5785 7335,5915 7625,5915 ; 7305,5570 7305,5495 7335,5465 7480,5465 7510,5495 7510,5585 7540,5615 7625,5615 ; 7405,5570 7405,5745 7475,5815 7625,5815
  Bottom Layer w35: 4460,2550 4720,2550 ; 4620,2677.09 4620,2757.91 ; 4620,2872.09 4732.09,2872.09 4770,2910 4770,2980 ; 4970,2550 4970,2980
  Bottom Layer w40: 4200,3620 4275,3695 4275,3940 ; 4200,4280 4200,4070 4225,4045 4345,4045 4375,4015 4375,3940 4375,3820 4375,3620 ; 4400,4280 4520,4280 4565,4325 4745,4325 4795,4275 4795,4010 4865,3940 5005.91,3940 ; 4475,3940 4695,3940 4732,3903 4732,3720 ; 4480,3960 4480,4115 4580,4215 4715,4215 ; 4730,3500 4730,3445 4790,3385 4790,2985 4770,2965 ; 4770,2550 4770,2470 4805,2435 5085,2435 5115,2465 5115,3825 ; 4866,3720 4866,3781 4910,3825 5115,3825 ; 4915,4215 5060,4215 5115,4160 5115,3825 ; 6220,6108 6220,6485 ; 6925,5615 7020,5615 7050,5645 7050,6250 6860,6440 6860,7020 6920,7080 7100,7080 ; 6925,7310 6925,7270 7100,7095 7100,6970 7100,6850 7200,6750 7200,6650 ; 7000,6970 7000,6650 7000,6565 7060,6505 7555,6505 7625,6435 7625,6215 ; 7125,7310 7245,7310 7290,7355 7470,7355 7520,7305 7520,7095 7635,6980 7670,6980 ; 7200,6970 7385.24,6970 ; 7205,6990 7205,7085.39 7364.61,7245 7440,7245 ; 7405,6655 7405,6515 7415,6505
  Bottom Layer w50: 4200,4280 4200,4350 4250,4400 4825,4400 4910,4315 4910,4215 ; 6925,7310 6925,7380 6975,7430 7550,7430 7635,7345 7635,7245
  Bottom Layer w100: 3300,4285 3300,4160 3365,4095 3655,4095 3730,4020 3730,3377 ; 3500,4285 3730,4285 ; 3930,4298 3930,4108 3965,4073 3965,3942 ; 6025,7315 6025,7190 6090,7125 6380,7125 6455,7050 6455,6407 ; 6225,7315 6455,7315 ; 6655,7328 6655,7138 6690,7103 6690,6972

## Keep-outs
Keep-Out Layer:
  lines w20: 2580,2370 2580,4483 5170,4483 5170,2370 2580,2370 ; 5305,5400 5305,7513 7725,7513 7725,5400 5305,5400

## Other copper
Bottom Layer:
  text "MRS" at 5910,7180 h140
  text "MRS" at 3185,4150 h140

## Silkscreen, mask and mechanical layers (free items; w line width, h text height)
Top Overlay:
  text "1000uF  25V" at 7355,7435 h30
  text "output" at 6395,7385 h60
  text "220V" at 6030,7375 h60
  text "12V" at 6950,7375 h60
  text "MRS" at 5535,7135 h140
  text "ASK" at 5330,6975 h60
  text "Relay 5V" at 6315,6745 h40
  text "11059200Hz" at 5490,6730 h30
  text "Learn" at 5875,6265 h30
  text "4007" at 6295,6205 h30
  text "1K" at 6340,6095 h30
  text "MOSI" at 5720,6090 h30
  text "MISO" at 5720,5990 h30
  text "SCK" at 5740,5890 h30
  text "VCC" at 5740,5790 h30
  text "IRF540" at 6015,5765 h30 r90
  text "Reset" at 5565,5695 h30
  text "GND" at 5740,5690 h30
  text "Learn" at 6015,5605 h30
  text "output" at 3670,4355 h60
  text "220V" at 3305,4345 h60
  text "12V" at 4225,4345 h60
  text "MRS" at 2810,4105 h140
  text "ASK" at 2605,3945 h60
  text "Relay 5V" at 3590,3715 h40
  text "22K" at 4820,3485 h30
  text "+" at 4775,3410 h30
  text "22Uf" at 4830,3290 h30
  text "100n" at 4120,3240 h30
  text "680" at 5055,3200 h30 r90
  text "MOSI" at 2995,3060 h30
  text "2.2Uf" at 3930,3020 h30
  text "MISO" at 2995,2960 h30
  text "+" at 3975,2865 h30
  text "SCK" at 3015,2860 h30
  text "22K" at 4155,2805 h30
  text "10K" at 4585,2800 h30
  text "VCC" at 3015,2760 h30
  text "Reset" at 2840,2665 h30
  text "GND" at 3015,2660 h30
  text "10N" at 4585,2605 h30
  text "Learn" at 3290,2575 h30
Bottom Overlay:
  text "1K" at 5440,6850 h30
  text "22p" at 5615,6840 h30
  text "22p" at 5765,6840 h30
  text "0" at 5875,6780 h30
  text "220" at 6055,6690 h30 r90
  text "100n" at 5465,6580 h30
  text "1K" at 5830,5590 h30
  text "1K" at 2715,3820 h30
  text "100n" at 2740,3550 h30
  text "1K" at 3105,2560 h30

## Text inside footprints (layer, text, board x,y; h text height)
2_2: Top Overlay "+" at 3270,3632.38 h60
2_2_1: Top Overlay "+" at 6795,6198 h60 r90
2_4_1: Top Overlay "+" at 5860,6420 h60 r270
2_4_2: Top Overlay "+" at 2940,3800 h60 r180